# EAGLE board circuitNotI2C (EAGLE 9.7.0)

Size 188.38 x 98.99 mm. Coordinates in mm from the lower left corner, seen from the top.
Outline: 0,0 188.38,0 188.38,98.99 0,98.99 0,0
Copper layers (1*16): Top 0.035mm / dielectric 1.5mm / Bottom 0.035mm
Design rules "default": minimum track width 6mil, minimum drill 0.35mm, track to track 6mil, track to pad 6mil, pad to pad 6mil, via to via 6mil, smd to smd 6mil, copper to edge 40mil, drill to drill 6mil, minimum pad ring 10mil, minimum via ring 8mil, stop-mask expansion 4mil, vias tented up to drill 0mil, thermal gap 10mil

## Footprints (pad centres in the part's own frame; a part is rotated, then mirrored left to right if it is on the bottom)
RESAD1016W63L850D250B = drill 0.83 pad 1.43: 1 -5.08,0; 2 5.08,0
HA-06-SM065 = drill 1 pad 1.676: 1 -2.54,-2.54; 2 0,2.54; 3 2.54,-2.54
ARDUINO-UNO-R3-SHIELD = drill 1.016 pad 1.88: 3.3V 24.13,-2.54; 5V 24.13,0; A0 24.13,12.7; A1 24.13,15.24; A2 24.13,17.78; A3 24.13,20.32; A4 24.13,22.86; A5 24.13,25.4; AREF -24.13,-13.97; D2 -24.13,20.32; D3 -24.13,17.78; D4 -24.13,15.24; D5 -24.13,12.7; D6 -24.13,10.16; D7 -24.13,7.62; D8 -24.13,3.81; D9 -24.13,1.27; D10 -24.13,-1.27; D11 -24.13,-3.81; D12 -24.13,-6.35; D13 -24.13,-8.89; GND@0 24.13,2.54; GND@1 24.13,5.08; GND@2 -24.13,-11.43; IOREF 24.13,-7.62; NC 24.13,-10.16; RES 24.13,-5.08; RX -24.13,25.4; SCL -24.13,-19.05; SDA -24.13,-16.51; TX -24.13,22.86; VIN 24.13,7.62
JHD-162A = drill 1.016 long: 1 -19.05,0; 2 -16.51,0; 3 -13.97,0; 4 -11.43,0; 5 -8.89,0; 6 -6.35,0; 7 -3.81,0; 8 -1.27,0; 9 1.27,0; 10 3.81,0; 11 6.35,0; 12 8.89,0; 13 11.43,0; 14 13.97,0; 15 16.51,0; 16 19.05,0

## Placement (x,y rotation side)
R3  220  [RESAD1016W63L850D250B]  151.47,84.26 270 top
RPOT3  250k  [HA-06-SM065]  110.83,58.86 0 top
U6  ARDUINO-UNO-R3-SHIELD  [ARDUINO-UNO-R3-SHIELD]  47.88,69.14 270 top
U7  LCD-16X2JHD-162A  [JHD-162A]  132.76,36.63 0 top

## Library data of the parts
R3 RPOT3 U6 U7 = Tinkercad

## Nets
U6_5V: R3.1 RPOT3.1 U6.5V U7.2
U6_D2: U6.D2 U7.14
U6_D3: U6.D3 U7.13
U6_D4: U6.D4 U7.12
U6_D5: U6.D5 U7.11
U6_D11: U6.D11 U7.6
U6_D12: U6.D12 U7.4
U6_GND: RPOT3.3 U6.GND@0 U6.GND@1 U6.GND@2 U7.1 U7.5 U7.16
U7_LED+: R3.2 U7.15
U7_VO: RPOT3.2 U7.3

## Tracks (layer width: path | path; a pad name or v marks a point on that pad's centre or on a via)
U6_5V  (3 unrouted)
U6_D2  (1 unrouted)
U6_D3  (1 unrouted)
U6_D4  (1 unrouted)
U6_D5  (1 unrouted)
U6_D11  (1 unrouted)
U6_D12  (1 unrouted)
U6_GND  (6 unrouted)
U7_LED+  (1 unrouted)
U7_VO  (1 unrouted)